# Altium PCB 野火_STM32F103C8T6_核心板_V1.0_底板PCB参考设计_AD格式.PcbDoc
Units mil, origin at the board's own origin, x right, y up, seen from the top; angles counter-clockwise.
Board outline 2106 x 1114.34 mil, 2 copper layers (TOP, BOTTOM), stack 10.4 mil thick; 2 components, 31 nets, 40 pads, 0 vias.
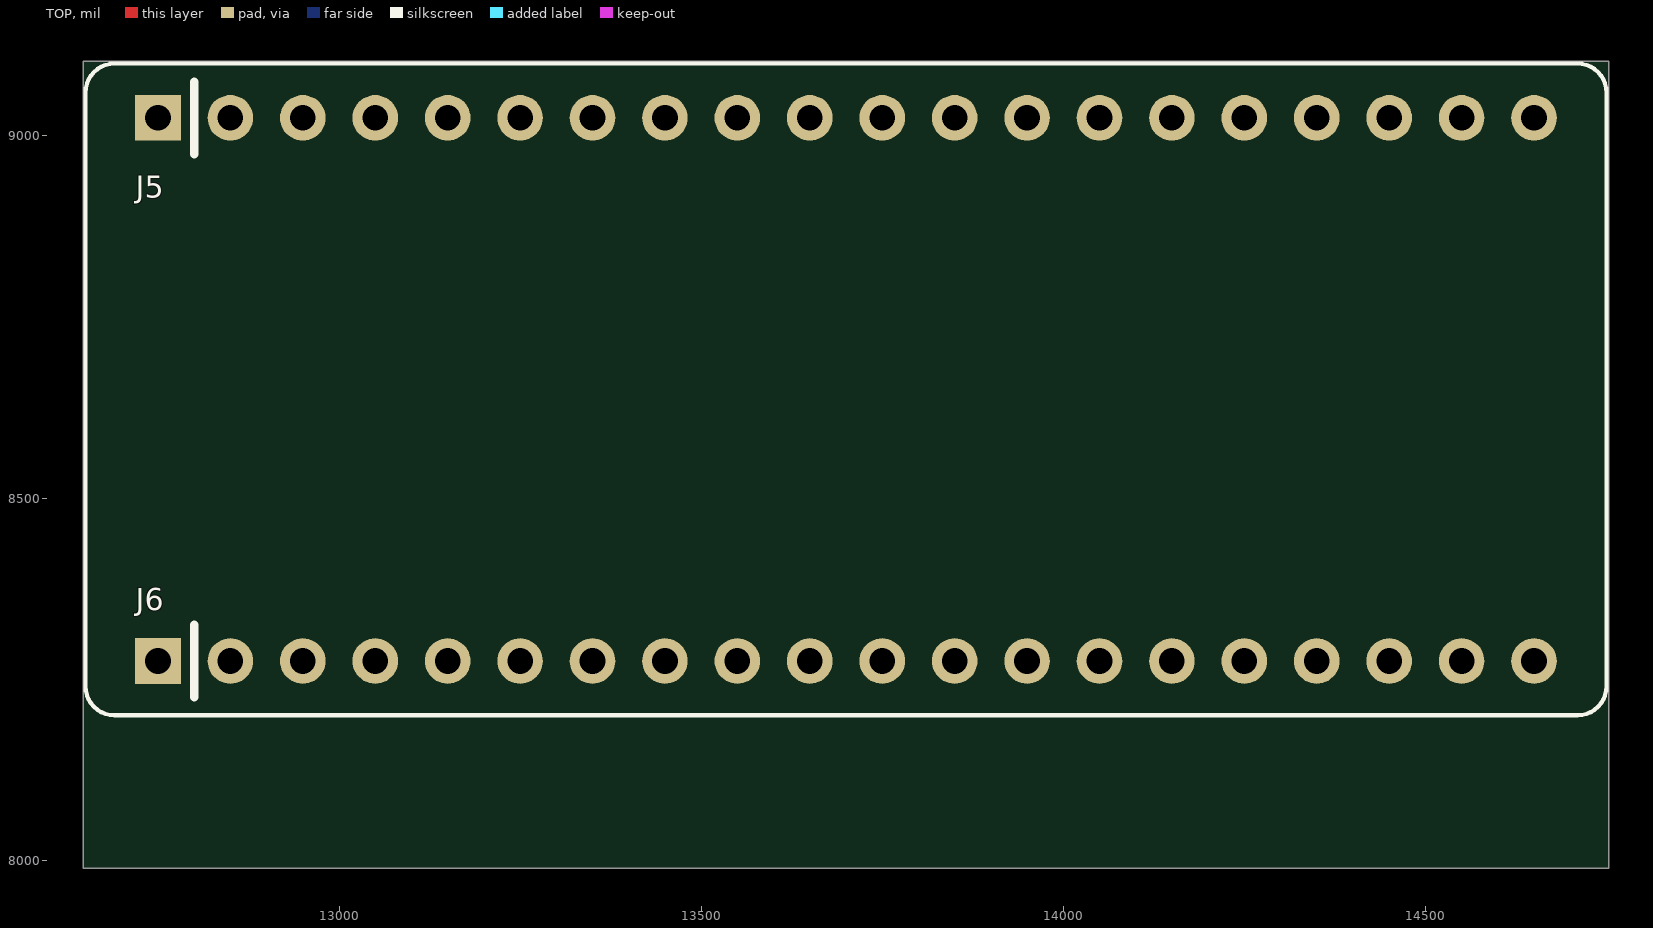
[diagram p0: TOP view]
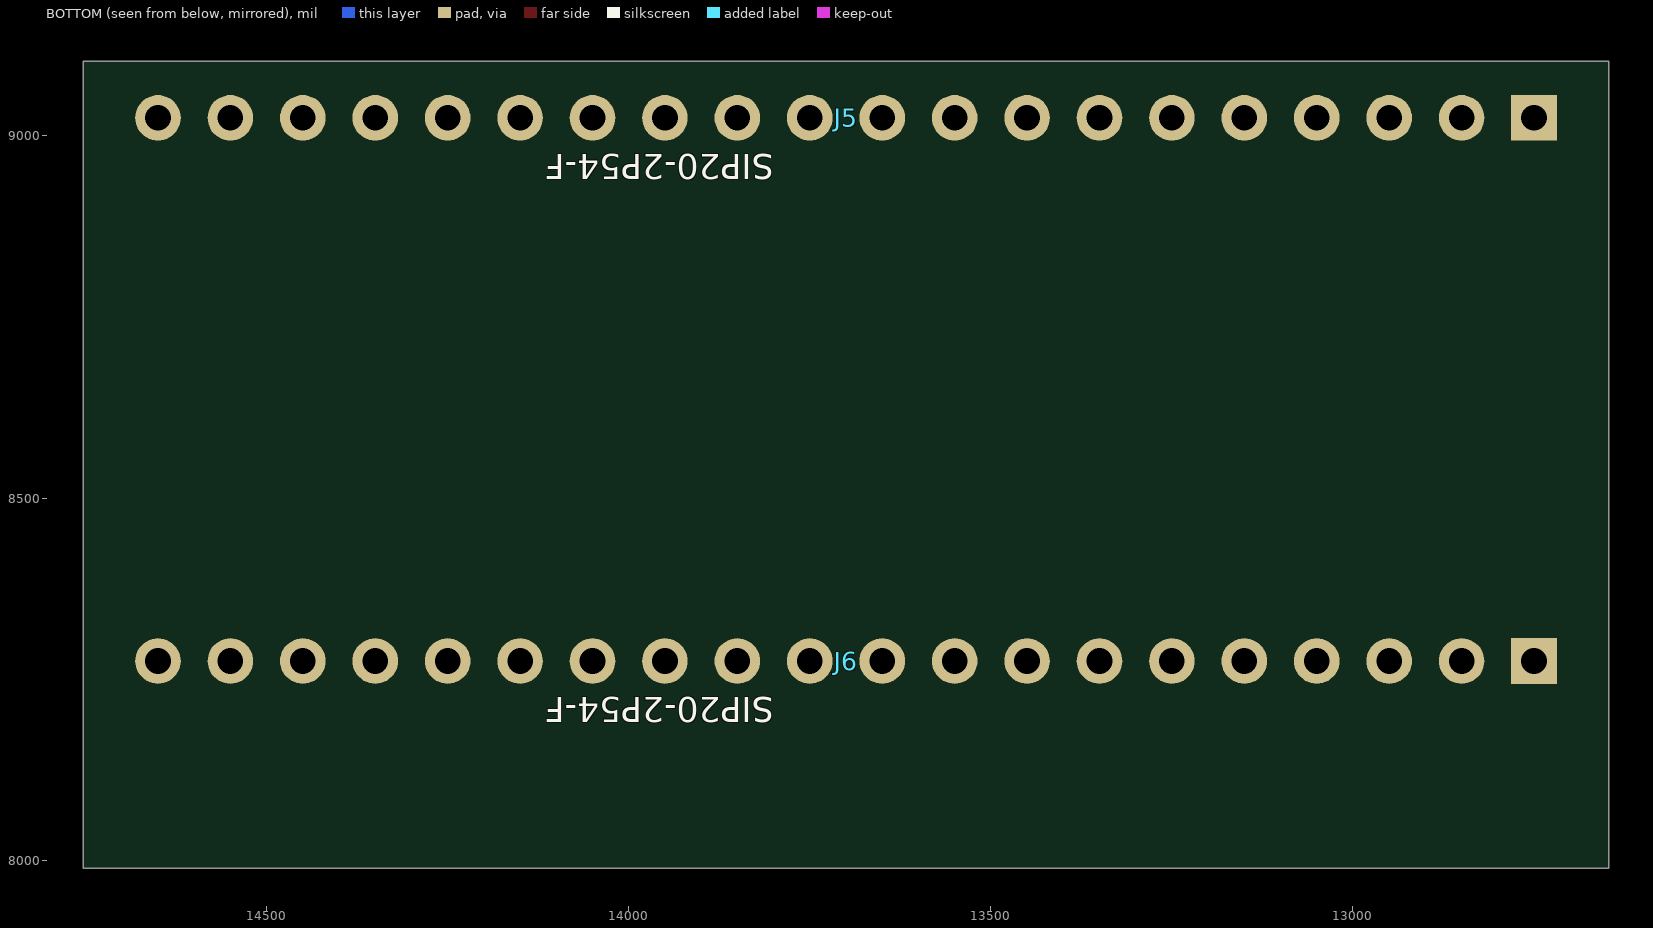
[diagram p1: BOTTOM view, seen from below]

## Layer stack, top to bottom
TOP: signal copper 1.2
Dielectric: core 8, FR-4, Dk 4.5
BOTTOM: signal copper 1.2

## Board outline
12647,7988.66 14753,7988.66 14753,9103 12647,9103

## Design rules (kind name [scope] priority, off if disabled: settings)
Clearance [All] p1: gap=10
PlaneConnect [All] p1: planeconnectstyle=Direct reliefexpansion=20 reliefentries=4 reliefconductorwidth=10 reliefairgap=10
PolygonConnect [All] p1: connectstyle=Direct reliefconductorwidth=10 reliefentries=4 polygonreliefangle="90 Angle" airgapwidth=10
RoutingVias [All] p1: holewidth=28 width=50 viastyle="Through Hole" minholewidth=28 minwidth=50 maxholewidth=28 maxwidth=50
SolderMaskExpansion [All] p1: expansion=4
Width [All] p1: maxlimit=10 minlimit=10 preferedwidth=10 impedancedriven=TRUE minimp=0.000000 maximp=0.000000 favimp=100000000000000005400000000000000.000000
27 further rules are at their usual default settings.

## Components (designator, comment, footprint, x,y, rotation, side; value= is the part's Value field where it differs from the comment)
J5 "CONN_HDR_1_SIP20-2P54-F_IO_SIP2" SIP20-2P54-F 13700,9025 r180 bottom
J6 "CONN_HDR_1_SIP20-2P54-F_IO_SIP2" SIP20-2P54-F 13700,8275 r180 bottom

## Footprints (in the part's own frame and the unit in brackets; to place one, negate y for a bottom-side part, rotate by r counter-clockwise, add the part's x,y. Pads: shape width x height; smd on the part's side, far side on the other; paste and mask are expansions set on the pad)
SIP20-2P54-F [mil] "SIP20-2P54-F"
  rect 62.99x62.99 / inner round 60 / far side rect 62.99x62.99 hole 35.43: 1(950,0)
  round 62.99 / inner round 60 / far side round 62.99 hole 35.43: 2(850,0) 3(750,0) 4(650,0) 5(550,0) 6(450,0) 7(350,0) 8(250,0) 9(150,0) 10(50,0) 11(-50,0) 12(-150,0) 13(-250,0) 14(-350,0) 15(-450,0) 16(-550,0) 17(-650,0) 18(-750,0) 19(-850,0) 20(-950,0)

## Nets (pads, with @x,y where several pads share a name; then routed paths per layer and width w, separated by ;. In a path a pad name is that pad's centre, name@x,y a point inside that pad or via, vN(x,y) a via of type N, cw(c..) or ccw(c..) an arc to the next point about the centre after c; other vN are vias at no path point)
3V3: J5.15 J5.17 J5.19 J6.1 J6.3 J6.20
5V: J5.1
GND: J5.9 J5.18 J5.20 J6.2 J6.19
PA0/WKUP: J5.14
PA1: J5.13
PA2: J5.12
PA3: J5.11
PA4: J5.10
PA5: J5.8
PA6: J5.7
PA7: J5.6
PA8: J6.8
PA9: J6.9
PA10: J6.10
PA15: J6.11
PB0: J5.5
PB1: J5.4
PB3: J6.12
PB4: J6.13
PB5: J6.14
PB6: J6.15
PB7: J6.16
PB8: J6.17
PB9: J6.18
PB10: J5.3
PB11: J5.2
PB12: J6.4
PB13: J6.5
PB14: J6.6
PB15: J6.7
PC13: J5.16

## Silkscreen, mask and mechanical layers (free items; w line width, h text height)
Top Overlay:
  lines w6: 12650,8240 ccw(c12690,8240) 12690,8200 14710,8200 ccw(c14710,8240) 14750,8240 14750,9060 ccw(c14710,9060) 14710,9100 12690,9100 ccw(c12690,9060) 12650,9060 12650,8240
DIMENSION:
  text "UNIT:MM" at 14442,7991.66 h50
DRAWING_ORIGIN:
  lines w1: 12625,8200 12675,8200 ; 12650,8175 12650,8225

## Text inside footprints (layer, text, board x,y; h text height)
J5: PIN_NUMBER "16" at 14230,9025 h25 r180; PIN_NUMBER "2" at 12840,9025 h25 r180; PIN_NUMBER "3" at 12940,9025 h25 r180; PIN_NUMBER "4" at 13040,9025 h25 r180; PIN_NUMBER "5" at 13140,9025 h25 r180; PIN_NUMBER "6" at 13240,9025 h25 r180; PIN_NUMBER "7" at 13340,9025 h25 r180; PIN_NUMBER "8" at 13440,9025 h25 r180; PIN_NUMBER "10" at 13630,9025 h25 r180; PIN_NUMBER "11" at 13730,9025 h25 r180; PIN_NUMBER "12" at 13830,9025 h25 r180; PIN_NUMBER "13" at 13930,9025 h25 r180; PIN_NUMBER "14" at 14030,9025 h25 r180; PIN_NUMBER "15" at 14130,9025 h25 r180; PIN_NUMBER "19" at 14530,9025 h25 r180; PIN_NUMBER "17" at 14330,9025 h25 r180; PIN_NUMBER "1" at 12740,9025 h25 r180; PIN_NUMBER "9" at 13540,9025 h25 r180; PIN_NUMBER "20" at 14630,9025 h25 r180; PIN_NUMBER "18" at 14430,9025 h25 r180; Bottom Overlay "SIP20-2P54-F" at 13800,8975 h35 r180
J6: PIN_NUMBER "18" at 14430,8275 h25 r180; PIN_NUMBER "17" at 14330,8275 h25 r180; PIN_NUMBER "16" at 14230,8275 h25 r180; PIN_NUMBER "15" at 14130,8275 h25 r180; PIN_NUMBER "14" at 14030,8275 h25 r180; PIN_NUMBER "13" at 13930,8275 h25 r180; PIN_NUMBER "12" at 13830,8275 h25 r180; PIN_NUMBER "7" at 13340,8275 h25 r180; PIN_NUMBER "6" at 13240,8275 h25 r180; PIN_NUMBER "5" at 13140,8275 h25 r180; PIN_NUMBER "4" at 13040,8275 h25 r180; PIN_NUMBER "9" at 13540,8275 h25 r180; PIN_NUMBER "8" at 13440,8275 h25 r180; PIN_NUMBER "11" at 13730,8275 h25 r180; PIN_NUMBER "10" at 13630,8275 h25 r180; PIN_NUMBER "1" at 12740,8275 h25 r180; PIN_NUMBER "20" at 14630,8275 h25 r180; PIN_NUMBER "3" at 12940,8275 h25 r180; PIN_NUMBER "2" at 12840,8275 h25 r180; PIN_NUMBER "19" at 14530,8275 h25 r180; Bottom Overlay "SIP20-2P54-F" at 13800,8225 h35 r180